# Altium PCB 温湿度.PcbDoc
Units mil, origin at the board's own origin, x right, y up, seen from the top; angles counter-clockwise.
Board outline 3735 x 1965 mil, 2 copper layers (Top Layer, Bottom Layer); 60 components, 69 nets, 275 pads, 113 vias.
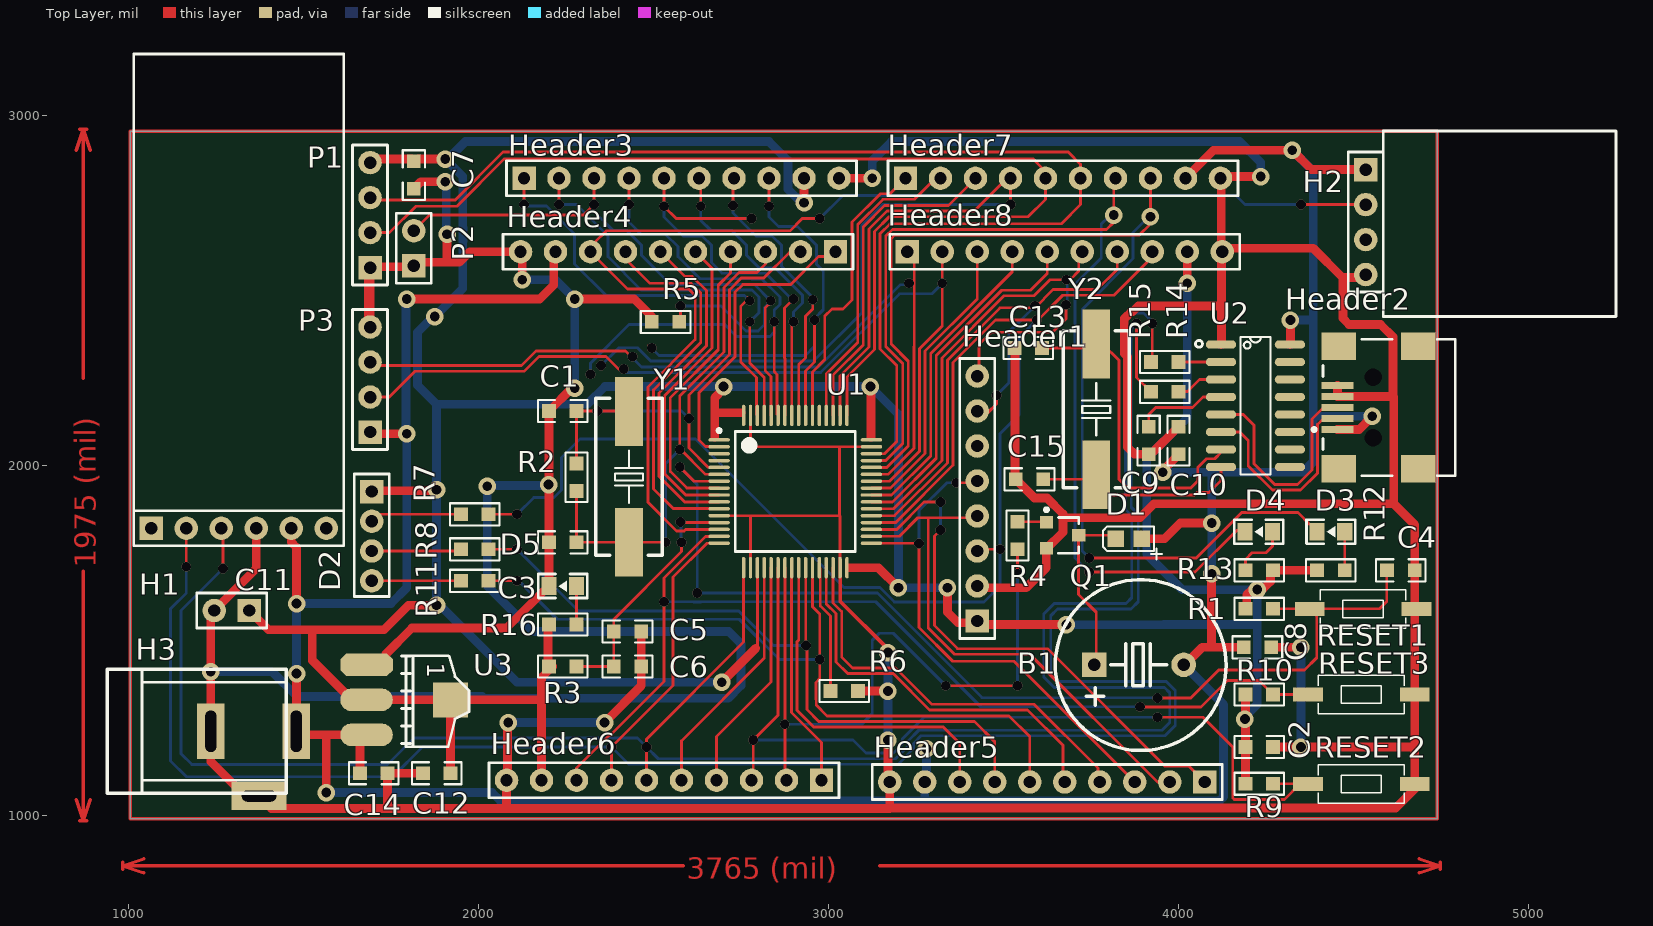
[diagram p0: Top Layer view]
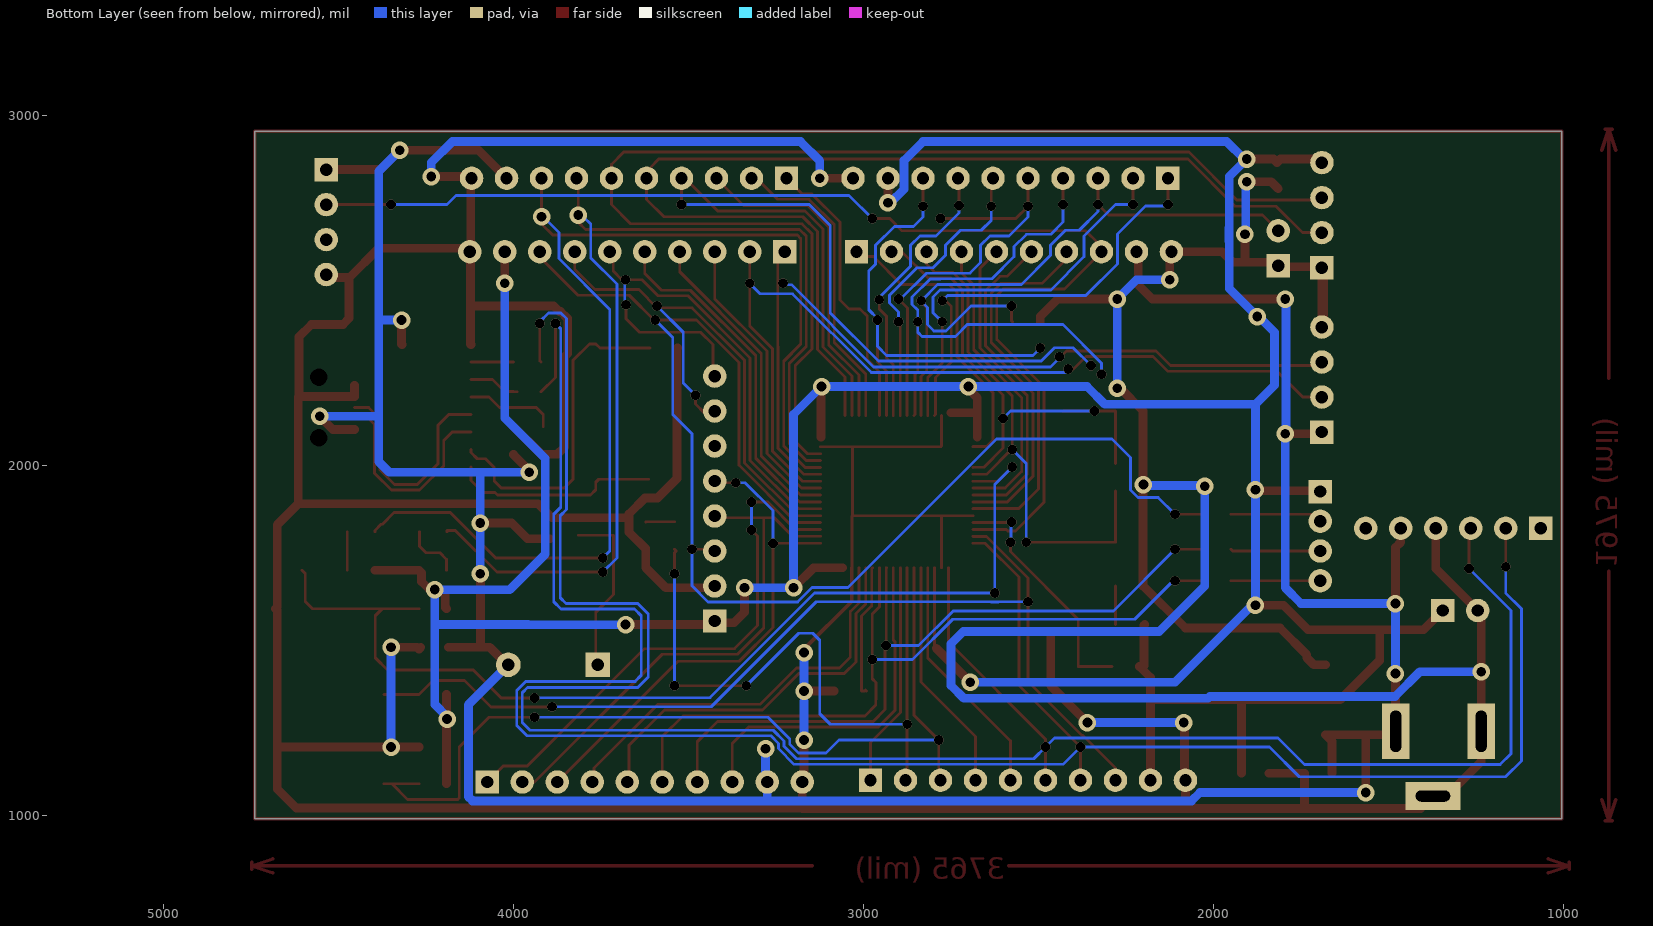
[diagram p1: Bottom Layer view, seen from below]

## Layer stack, top to bottom
Top Solder: solder mask 0.4, Solder Resist, Dk 3.5
Top Layer: signal copper 1.4
Dielectric 1: dielectric 12.6, FR-4, Dk 4.8
Bottom Layer: signal copper 1.4
Bottom Solder: solder mask 0.4, Solder Resist, Dk 3.5

## Board outline
1005,990 4740,990 4740,2955 1005,2955

## Design rules (kind name [scope] priority, off if disabled: settings)
Clearance [All] p1: gap=8 ignorepadtopadclearanceinfootprint=FALSE
PolygonConnect [All] p1: connectstyle=Relief reliefconductorwidth=10 reliefentries=4 polygonreliefangle="90 Angle" airgapwidth=10
RoutingVias [All] p1: holewidth=12 width=25 viastyle="Through Hole" minholewidth=8 minwidth=20 maxholewidth=16 maxwidth=28
SolderMaskExpansion [All] p1: expansion=4
Width Width_1 [InNetClass('Power')] p1: maxlimit=30 minlimit=8 preferedwidth=25
Width [All] p2: maxlimit=10 minlimit=8 preferedwidth=8
30 further rules are at their usual default settings.

## Classes and differential pairs
net class Power: GND VCC3.3 VCC5

## Components (designator, comment, footprint, x,y, rotation, side; value= is the part's Value field where it differs from the comment)
B1 "BEEP6.5mm" "BEEP 6.5x12x6" 3887.05,1430 r270 top
C1 "10pf" 0805C 2240.63,2155 r0 top value=10pF
C2 "0.1uf" 0805C 4230.63,1195 r0 top
C3 "10pf" 0805C 2240.63,1780 r0 top value=10pF
C4 "10uF" 0805C 4635.63,1700 r0 top
C5 "10uF" 0805C 2425.63,1525 r180 top
C6 "104" 0805C 2425.63,1425 r180 top
C7 "0.1uF" 0805C 1815,2829.37 r270 top
C8 "104" 0805C 4225.63,1480 r180 top
C9 "0.1uf" 0805C 3915,2070.63 r270 top
C10 "0.1uf" 0805C 4000,2070.63 r270 top
C11 "220uf" HDR2.54-LI-2P 1295,1585 r180 top
C12 "104" 0805C 1880.63,1120 r0 top
C13 "22pf" 0805C 3570.63,2335 r180 top value=0.1uf
C14 "104" 0805C 1700.63,1120 r180 top
C15 "22pf" 0805C 3574.37,1960 r180 top value=0.1uf
D1 "Diode 1N4148" 0805D 3857.6,1790 r180 top
D2 "LEDFULL" LEDFULL 1695,1775 r270 top
D3 "LED0" LED_0805_B 4435.63,1810 r0 top
D4 "LED0" LED_0805_B 4229.37,1810 r0 top
D5 "LED0" LED_0805_B 2240.63,1655 r0 top
H1 "BLUETOOTH模块" BLUETOOTH 1305,1860 r0 top
H2 "DHT11温湿度传感器" DHT11 4535,2695 r270 top
H3 "POWER" DC-005 1235,1240 r180 top
Header1 "Header x8" HDR2.54-M-LI-8P 3425,1905 r90 top
Header2 "USB_MICRO" USB/SM0.8-6H5 4763.58,2165.2 r0 top
Header3 "switch" HDR2.54-LI-10P 2580,2820 r0 top
Header4 "switch" HDR2.54-LI-10P 2570,2610 r180 top
Header5 "switch" HDR2.54-LI-10P 3625,1095 r180 top
Header6 "switch" HDR2.54-LI-10P 2530,1100 r180 top
Header7 "switch" HDR2.54-LI-10P 3670,2820 r0 top
Header8 "switch" HDR2.54-LI-10P 3675,2610 r0 top
P1 "ACIN" HDR2.54-LI-4P 1690,2715 r90 top
P2 "P2" HDR2.54-LI-2P 1815,2620 r90 top
P3 "ACIN" HDR2.54-LI-4P 1690,2245 r90 top
Q1 "S8050" SOT-23R 3663.74,1800 r270 top
R1 "10K" 0805R 4230.63,1590 r0 top value=330
R2 "Res2" 0805R 2280,1965.63 r90 top value=1M
R3 "10R" 0805R 2240.63,1425 r180 top
R4 "1K" 0805R 3540,1799.37 r90 top
R5 "10K" 0805R 2534.37,2410 r0 top
R6 "10K" 0805R 3045,1355 r180 top
R7 "1K" 0805R 1989.37,1860 r0 top value=330
R8 "1K" 0805R 1989.37,1760 r0 top value=330
R9 "10K" 0805R 4230.63,1090 r0 top value=330
R10 "10K" 0805R 4230.63,1345 r0 top value=330
R11 "1K" 0805R 1989.37,1670 r0 top value=330
R12 "1K" 0805R 4435.63,1700 r0 top value=330
R13 "1K" 0805R 4230.63,1700 r180 top value=330
R14 "330Ω" 0805R 3960.63,2295 r0 top value=330
R15 "330Ω" 0805R 3960.63,2210 r0 top value=330
R16 "1K" 0805R 2240.63,1545 r0 top value=330
RESET1 "RESET" QKEY 4730,1730 r180 top
RESET2 "RESET" QKEY 4725,1230 r180 top
RESET3 "RESET" QKEY 4725,1485 r180 top
U1 "STM32F103RC" LQFP64-高密度 2905,1925 r0 top
U2 "CH340G" SOP16 4220,2170 r270 top
U3 "AMS1117-3.3" AMS1117 1680.06,1430.03 r270 top
Y1 "8MHz" "OSC HC-49SMD" 2430,1967.01 r90 top
Y2 "12MHz" "OSC HC-49SMD" 3765,2160 r90 top

## Footprints (in the part's own frame and the unit in brackets; to place one, negate y for a bottom-side part, rotate by r counter-clockwise, add the part's x,y. Pads: shape width x height; smd on the part's side, far side on the other; paste and mask are expansions set on the pad)
0805C [mm]
  rect 1x1 smd: 1(-1,0) 2(1,0)
  silkscreen extent -1.8,-0.8 1.8,0.8
0805D [mm]
  rect 1.2x1.2 smd: 1(0.95,0) 2(-0.95,0)
  silkscreen extent -2.42,-0.9 1.85,1.49
0805R [mm]
  rect 1x1 smd: 1(-1,0) 2(1,0)
  silkscreen extent -1.8,-0.8 1.8,0.8
AMS1117 [mil]
  oct 65x150 smd: 1(0.03,-0.06)
  oval 65x150 smd: 2(100.03,-0.06) 3(200.03,-0.06)
  rect 100x100 smd: 4(100.03,239.94)
  silkscreen extent -26,100 234,293
"BEEP 6.5x12x6" [mm] "6.5*12*6mm(脚距,直径,高度)"
  rect 1.8x1.8 hole 0.9: 1(0,-3.25)
  round 1.8 hole 0.9: 2(0,3.25)
  silkscreen extent -6.17,-6.07 6.22,6.33, body extent -6,-6 6,6, height 6.05
BLUETOOTH [mm] "蓝牙模块"
  rect 1.7x1.7 hole 0.9: 1(-6.096,-1.016)
  round 1.7 hole 0.9: 2(-3.556,-1.016) 3(-1.016,-1.016) 4(1.524,-1.016) 5(4.064,-1.016) 6(6.604,-1.016)
  silkscreen extent -7.37,-2.29 7.87,33.4, body extent -7.37,-2.29 7.87,0.25, height 8.5
DC-005 [mm] "5.5*2.1mm，DC30V,2.5A"
  rect 2x4 hole 0.8 slot 3 at 90 deg: 1(-6.2,0) 2(0,0)
  rect 4x2 hole 0.8 slot 2.5 at 0 deg: 3(-3.5,4.7)
  silkscreen extent -5.48,-4.5 7.5,4.5, body extent -6.55,-4.5 7.5,4.8, height 11.2
DHT11 [mm] "温湿度传感器"
  rect 1.7x1.7 hole 0.9: 1(-3.81,0)
  round 1.7 hole 0.9: 2(-1.27,0) 3(1.27,0) 4(3.81,0)
  silkscreen extent -6.6,-1.27 6.86,18.16, body extent -5.08,-1.27 5.08,1.27, height 8.5
HDR2.54-LI-2P [mm] "排针，2脚"
  rect 1.7x1.7 hole 0.9: 1(-1.27,0)
  round 1.7 hole 0.9: 2(1.27,0)
  silkscreen extent -2.54,-1.27 2.54,1.27, body extent -2.54,-1.27 2.54,1.27, height 8.5
HDR2.54-LI-4P [mm] "排针，4脚"
  rect 1.7x1.7 hole 0.9: 1(-3.81,0)
  round 1.7 hole 0.9: 2(-1.27,0) 3(1.27,0) 4(3.81,0)
  silkscreen extent -5.08,-1.27 5.08,1.27, body extent -5.08,-1.27 5.08,1.27, height 8.5
HDR2.54-LI-10P [mm] "排针，10脚"
  rect 1.7x1.7 hole 0.9: 1(-11.43,0)
  round 1.7 hole 0.9: 2(-8.89,0) 3(-6.35,0) 4(-3.81,0) 5(-1.27,0) 6(1.27,0) 7(3.81,0) 8(6.35,0) 9(8.89,0) 10(11.43,0)
  silkscreen extent -12.7,-1.27 12.7,1.27, body extent -12.7,-1.27 12.7,1.27, height 8.5
HDR2.54-M-LI-8P [mm] "排母，8脚"
  rect 1.7x1.7 hole 0.9: 1(-8.89,0)
  round 1.7 hole 0.9: 2(-6.35,0) 3(-3.81,0) 4(-1.27,0) 5(1.27,0) 6(3.81,0) 7(6.35,0) 8(8.89,0)
  silkscreen extent -10.16,-1.27 10.16,1.27, body extent -10.16,-1.27 10.16,1.27, height 8.5
LED_0805_B [mm]
  rect 1.1x1.3 smd: 1(1,0) 2(-1,0)
  silkscreen extent -1.78,-0.87 1.78,0.87, body extent -1.01,-0.63 1.01,0.63, height 1.1
LEDFULL [mm] "全彩LED"
  rect 1.7x1.7 hole 0.9: 1(-3.81,0)
  round 1.7 hole 0.9: 2(-1.651,0) 3(0.508,0) 4(2.667,0)
  silkscreen extent -5.08,-1.27 3.81,1.27
LQFP64-高密度 [mm]
  oval 1.55x0.25 smd: 1(-5.525,3.75) 2(-5.525,3.25) 3(-5.525,2.75) 4(-5.525,2.25) 5(-5.525,1.75) 6(-5.525,1.25) 7(-5.525,0.75) 8(-5.525,0.25) 9(-5.525,-0.25) 10(-5.525,-0.75) 11(-5.525,-1.25) 12(-5.525,-1.75) 13(-5.525,-2.25) 14(-5.525,-2.75) 15(-5.525,-3.25) 16(-5.525,-3.75) 33(5.525,-3.75) 34(5.525,-3.25) 35(5.525,-2.75) 36(5.525,-2.25) 37(5.525,-1.75) 38(5.525,-1.25) 39(5.525,-0.75) 40(5.525,-0.25) 41(5.525,0.25) 42(5.525,0.75) 43(5.525,1.25) 44(5.525,1.75) 45(5.525,2.25) 46(5.525,2.75) 47(5.525,3.25) 48(5.525,3.75)
  oval 0.25x1.55 smd: 17(-3.75,-5.525) 18(-3.25,-5.525) 19(-2.75,-5.525) 20(-2.25,-5.525) 21(-1.75,-5.525) 22(-1.25,-5.525) 23(-0.75,-5.525) 24(-0.25,-5.525) 25(0.25,-5.525) 26(0.75,-5.525) 27(1.25,-5.525) 28(1.75,-5.525) 29(2.25,-5.525) 30(2.75,-5.525) 31(3.25,-5.525) 32(3.75,-5.525) 49(3.75,5.525) 50(3.25,5.525) 51(2.75,5.525) 52(2.25,5.525) 53(1.75,5.525) 54(1.25,5.525) 55(0.75,5.525) 56(0.25,5.525) 57(-0.25,5.525) 58(-0.75,5.525) 59(-1.25,5.525) 60(-1.75,5.525) 61(-2.25,5.525) 62(-2.75,5.525) 63(-3.25,5.525) 64(-3.75,5.525)
  silkscreen extent -5.65,-4.35 4.35,4.55, body extent -5,-5 5,5, height 1.6
"OSC HC-49SMD" [mm]
  rect 5x2 smd: 1(-4.75,0) 2(4.75,0)
  silkscreen extent -5.7,-2.4 5.7,2.4, body extent -6.5,-2.32 6.5,2.33, height 4.63
QKEY [mil]
  rect 85x40 smd: 1(50,140) 2(355,140)
  silkscreen extent 80,85 325,195
SOP16 [mm]
  oval 0.6x2.2 smd: 1(-4.445,-2.5) 2(-3.175,-2.5) 3(-1.905,-2.5) 4(-0.635,-2.5) 5(0.635,-2.5) 6(1.905,-2.5) 7(3.175,-2.5) 8(4.445,-2.5) 9(4.445,2.5) 10(3.175,2.5) 11(1.905,2.5) 12(0.635,2.5) 13(-0.635,2.5) 14(-1.905,2.5) 15(-3.175,2.5) 16(-4.445,2.5)
  silkscreen extent -5,-4.35 5,1.1
SOT-23R [mm]
  rect 0.9x0.95 smd: 1(0.95,-1.048) 2(-0.95,-1.048) 3(0,1.302)
  silkscreen extent -1.98,-1.17 1.3,1.3
USB/SM0.8-6H5 [mm]
  rect 2.3x0.5 smd: 1(-7.85,-1.6) 2(-7.85,-0.8) 3(-7.85,0) 4(-7.85,0.8) 5(-7.85,1.6)
  rect 2.5x2 smd: 6(-7.75,4.45) 7(-1.996,4.45) 8(-7.75,-4.45) 9(-1.996,-4.45)
  round 0.6 hole 1.27 unplated: MH1(-5.25,2.2) MH2(-5.25,-2.2)
  silkscreen extent -9.67,-4.95 0.7,4.95

## Part data
B1: library part BEEP
C1 C3 C9 C10 C12 C13 C14 C15: library part Cap, "Capacitor", LatestRevisionDate=17-Jul-2002, LatestRevisionNote="Re-released for DXP Platform.", PackageReference=RAD-0.3, Published=8-Jun-2000, Publisher="Altium Limited"
  C9 C10 C12 C13 C14 C15: PackageDescription="Radial Cap, Thru-Hole; 2 Leads; 0.3 in Pin Spacing"
C2 C6 C8: library part C
C4 C7: library part CAP, "Capacitor"
C5: library part C_2
C11: library part "Cap Pol3", "Polarized Capacitor (Surface Mount)", LatestRevisionDate=29-May-2009, LatestRevisionNote="IPC-7351 Footprint Added.", PackageDescription="Chip Capacitor", PackageReference=C0805, Published=8-Jun-2000, Publisher="Altium Limited"
D1: "High Conductance Fast Diode", Code_JEDEC=DO-204-AH, ComponentLink1Description="Manufacturer Link", ComponentLink1URL=http://www.fairchildsemi.com/, ComponentLink2Description=Datasheet, ComponentLink2URL=http://www.fairchildsemi.com/ds/1N%2F1N4148.pdf, DatasheetVersion=1997, LatestRevisionDate=17-Jul-2002, LatestRevisionNote="Re-released for DXP Platform.", PackageDescription="Diode, Axial; Body 3.8 x 1.9 mm (LxDia. max), Lead Dia. 0.53 mm (max)", PackageReference=DO-35, Published=8-Jun-2000, Publisher="Altium Limited"
D2: "全彩LED"
D3 D4 D5: "Typical INFRARED GaAs LED", LatestRevisionDate=08-Jul-2005, LatestRevisionNote="Mech Layer 1 removed.", PackageDescription="LED; 2 Leads", PackageReference=LED-0, Published=8-Jun-2000, Publisher="Altium Limited"
H1: library part BLUETOOTH
H2: library part DHT11
H3: library part DC_IN
Header1: "红外2个 4VCC 4GND 2信号线"
Header3 Header4 Header5 Header6 Header7 Header8: library part "Header X10"
P1 P3: library part P4, "Header, 4-Pin"
P2: "Header, 2-Pin"
Q1: library part NPN, "8050/BCW846/BCW847"
R1 R7 R8 R9 R10 R11 R12 R13 R14 R15 R16: library part Res2, "Resistor", Manufacturer="Generic Components", Class=Passive, Published=08/06/2000, Publisher="Altium Hobart Technology Centre", SubClass=Resistor
R2: "Resistor", LatestRevisionDate=17-Jul-2002, LatestRevisionNote="Re-released for DXP Platform.", PackageReference=AXIAL-0.4, Published=8-Jun-2000, Publisher="Altium Limited"
R3 R4: library part R_1
R5 R6: library part R
RESET1 RESET2 RESET3: library part SW-PB
Y1 Y2: library part XTAL, "Crystal Oscillator", LatestRevisionDate=17-Jul-2002, LatestRevisionNote="Re-released for DXP Platform.", Published=8-Jun-2000, Publisher="Altium Limited"

## Via types
v1: diameter 28, hole 28, Top Layer to Bottom Layer, 68 vias
v2: diameter 50, hole 28, Top Layer to Bottom Layer, 45 vias

## Nets (pads, with @x,y where several pads share a name; then routed paths per layer and width w, separated by ;. In a path a pad name is that pad's centre, name@x,y a point inside that pad or via, vN(x,y) a via of type N, cw(c..) or ccw(c..) an arc to the next point about the centre after c; other vN are vias at no path point)
BOOT0: Header3.3 P2.2 R5.2 U1.60 | length 2012.5
  Top Layer w8: P2.2 1860,2715 2300,2715 v1(2330,2745) 2330,2810 2325,2815 Header3.3 ; R5.2 2576.86,2413.12 v1(2576.86,2455) ; v1(2835,2470) 2835,2465.23 2819,2449.23 2819,2271.25 2836.1,2254.15 U1.60
  Bottom Layer w8: v1(2330,2745) 2330,2725 2383.54,2671.46 2422.83,2671.46 2465.46,2628.83 2465.46,2600.24 2548.7,2517 2773.25,2517 2773.72,2516.54 2788.46,2516.54 v1(2835,2470) 2835,2469.23 2817,2451.23 2817,2402 2799,2384 2764.23,2384 2693.23,2455 v1(2576.86,2455)
GND: C1.1 C2.2 C3.1 C4.2 C5.1 C6.1 C7.2 C8.1 C9.2 C10.1 C11.2 C12.1 C13.2 C14.1 C15.2 D5.2 H1.4 H2.4 H3.2 H3.3 Header1.2 Header2.4 Header2.5 Header3.10 Header4.10 Header5.10 Header6.10 Header7.10 Header8.10 P1.1 P2.1 P3.4 Q1.1 R5.1 R6.1 RESET1.1 RESET2.1 RESET3.1 U1.12 U1.18 U1.31 U1.47 U1.63 U2.1 U3.1 | length 21203.3
  Top Layer w8: U1.12 2777.05,1856.1 ; U1.18 2777.05,1856.1 ; U1.63 2777.05,2055 2779.09,2052.95 3030,2052.95 ; U1.31 3032.95,1855 3031.85,1856.1 ; U1.47 3030,2052.95 ; 2777.05,1856.1 3031.85,1856.1 ; 3030,2052.95 3031.85,2051.1 3031.85,1856.1
  Top Layer w10: U1.31 3032.95,1612.05 3170,1475 v2(3170,1465)
  Top Layer w25: H1.4 1365,1705 C11.2 1235,1575 v2(1235,1410) H3.2 1235,1153.39 1333.43,1054.96 H3.3 1408.26,1019.5 3174,1019.5 3175,1020.5 ; U3.1 1713.57,1430 1733.57,1450 1733.57,1458.57 1810,1535 2080,1535 D5.2@2201.26,1656.26 ; P3.4@1685,2395 P1.1@1685,2565 ; P3.4 P1.1 1692.5,2567.5 1812.5,2567.5 P2.1 1825,2580 1910,2580 ; 1740,1025 C14.1 C12.1 ; C7.2 1835,2810 v2(1905,2810) ; v2(1910,2660) 1910,2580 ; 2080,1025 Header6.10 2082.5,1102.5 2082.5,1262.5 v2(2085,1265) ; v2(2125,2530) 2125,2605 Header4.10 1975,2610 1945,2580 1910,2580 ; D5.2 D5.2@2201.26,1656.26 ; v2(2275,2220) 2266.26,2220 C1.1 C3.1 D5.2@2201.26,1656.26 ; v2(2275,2475) 2445,2475 2495,2425 R5.1 ; 2425.5,1330 2360.5,1265 v2(2360,1265) 2465,1370 C6.1 C5.1 ; Header3.10 v2(3125,2820) ; R6.1 v2(3170,1355) ; v2(3170,1215) 3170,1125 3185,1110 3170,1095 3175,1090 3175,1020.5 ; Header1.2@3425,1650 3565,1650 3622.48,1707.48 Q1.1 3623.46,1762.6 3670,1809.13 3670,1845 ; C13.2 3533.13,2333.13 3533.13,1961.87 C15.2 3588.11,1906.89 3624.08,1906.89 3670,1860.97 3670,1845 ; C10.1 3921.26,2031.26 C9.2 3874.64,2031.26 3854.5,2051.4 3854.5,2310.15 3845,2319.65 3845,2420 3846.21,2420 3865.71,2439.5 3869.5,2439.5 3885,2455 4123.29,2455 ; U2.1 4122.6,2345 4123.29,2345.69 4123.29,2455 ; v2(4235,2825) 4125,2825 Header7.10 4122.5,2817.5 4122.5,2612.5 Header8.10 ; C8.1 4270,1475 4275,1480 v2(4350,1480) ; C2.2 v2(4350,1195) 4675,1195 ; Header2.5 Header2.4 4613.31,2196.69 ; H2.4 4526.98,2536.98 4471.98,2536.98 4470,2535 ; 3175,1020.5 4620.5,1020.5 4675,1075 RESET2.1 4675,1195 ; 3670,1845 3675.03,1850.03 3890.03,1850.03 3930,1890 4615,1890 ; 4123.29,2455 4123.29,2608.29 Header8.10 ; Header8.10 4135,2620 4385,2620 4470,2535 ; 4470,2535 4470,2420 4487.5,2402.5 4577.5,2402.5 4613.31,2366.69 4613.31,2196.69 ; 4613.31,2196.69 4615,2195 4615,1890 ; 4615,1890 4675,1830 C4.2 4675,1595 RESET1.1 4675,1585 RESET3.1 4675,1195
  Bottom Layer w25: v2(1235,1410) 1410.65,1410 1481.41,1339.24 2010.82,1339.24 2015.56,1334.5 2713.85,1334.5 2750,1370.65 2750,1490 2715,1525 2155,1525 2025,1655 v2(2025,1940) 2027.5,1942.5 2197.5,1942.5 v2(2200,1945) ; v2(1905,2810) 1907.5,2807.5 1907.5,2662.5 v2(1910,2660) ; v2(2085,1265) v2(2360,1265) ; v2(2125,2530) 2220,2530 v2(2275,2475) v2(2275,2220) ; v2(3125,2820) 3125,2870 3180,2925 4175,2925 4235,2865 v2(4235,2825) ; v2(3170,1215) 3170,1325 ; v2(3170,1355) v2(3170,1465) ; v2(4350,1195) v2(4350,1480)
NetB1_1: B1.1 D1.1 Q1.3 | length 494.2
  Top Layer w8: B1.1 3765,1435.91 3765,1580 3714,1631 3714,1799 Q1.3 D1.1@3815.24,1800
NetC5_2: C5.2 C6.2 R3.1 U1.13 | length 702.5
  Top Layer w8: R3.1@2290,1425 C6.2 C5.2 2386.26,1559.6 2574.45,1747.8 2580,1753.34 v1(2580,1780) ; v1(2576.79,1838.21) 2578.58,1836.42 U1.13
  Bottom Layer w8: v1(2576.79,1838.21) 2578.4,1836.6 2578.4,1781.6 v1(2580,1780)
NetC9_1: C9.1 U2.4 | length 262.3
  Top Layer w8: C9.1 3915,2145 3935,2165 4040,2165 4070,2195 U2.4
NetC13_1: C13.1 U2.7 Y2.2 | length 959.5
  Top Layer w8: C13.1 3752.99,2335 Y2.2 3782.99,2347.01 3830,2300 3830,1960 3855,1935 4035,1935 4055,1955 4055,1993.6 4080.22,2018.81 4103.81,2018.81 4121.57,2036.57 U2.7
NetC15_1: C15.1 U2.8 Y2.1 | length 594.7
  Top Layer w8: C15.1 3756.5,1960 3765,1951.5 3765,1930 3780,1915 4045.75,1915 4052.75,1922 4087,1922 4121.57,1956.57 U2.8
NetD2_2: D2.2 R7.1 | length 263.3
  Top Layer w8: D2.2 1715,1860 R7.1
NetD2_3: D2.3 R8.1 | length 257.1
  Top Layer w8: D2.3 1945,1755 R8.1
NetD2_4: D2.4 R11.1 | length 255
  Top Layer w8: D2.4 R11.1
NetD3_1: D3.1 R12.2 | length 110
  Top Layer w8: R12.2 D3.1
NetD4_1: D4.1 R13.2 | length 165.5
  Top Layer w8: R13.2 4191.26,1731.26 4210,1750 4250,1750 4268.74,1768.74 D4.1
NetD5_1: D5.1 R16.2 | length 110
  Top Layer w8: R16.2 D5.1
NetQ1_2: Q1.2 R4.2 | length 83
  Top Layer w8: R4.2 3621.14,1838.74 Q1.2
NetR6_2: R6.2 U1.28 | length 378.7
  Top Layer w8: U1.28 2976.66,1704.72 2976.66,1598.34 3005.63,1569.37 R6.2 R6.2@2996.26,1355 ; R6.2@2991.26,1355 R6.2@2993.9,1357.64
NetR14_2: R14.2 U2.2 | length 121.6
  Top Layer w8: R14.2 U2.2
NetR15_2: R15.2 U2.3 | length 146.1
  Top Layer w8: R15.2@3990,2210 R15.2 4000.81,2210.81 4025.81,2210.81 4060,2245 U2.3
OSC_IN: C1.2 Header4.2 R2.2 U1.5 Y1.2 | length 1427.8
  Top Layer w8: R2.2 C1.2 v1(2340,2155) 2429.01,2155 Y1.2 ; U1.5 2687.13,1994.25 2655.75,1994.25 2601,2049 2601,2200.95 2717,2316.95 2717,2501.4 2750.6,2535 2815,2535 2890,2610 Header4.2
  Bottom Layer w8: v1(2340,2155) 2580,2155 v1(2601,2134)
OSC_OUT: C3.2 Header4.3 R2.1 U1.6 Y1.1 | length 1520
  Top Layer w8: R2.1 C3.2 Y1.1 v1(2535,1780) ; U1.6 2648.46,1974.21 2575,2047.67 2575,2197.58 2701,2323.58 2701,2508.02 2743.98,2551 2796,2551 2820,2575 Header4.3
  Bottom Layer w8: v1(2535,1780) 2535,2005 v1(2575,2045)
PA0: H2.2 Header4.8 U1.14 | length 3538.5
  Top Layer w8: U1.14 2592.08,1816.73 2587.56,1812.21 2566.02,1812.21 2484,1894.23 2484,2224 2619,2359 2619,2485.75 2600.75,2504 2426,2504 Header4.8 2329.76,2619.76 2329.76,2634.76 2365,2670 2890,2670 2925,2705 v1(2975,2705) ; v1(4350,2745) H2.2
  Bottom Layer w8: v1(2975,2705) 3041,2771 4164,2771 4190,2745 v1(4350,2745)
PA1: Header6.8 R10.2 RESET3.2 U1.15 | length 2903.1
  Top Layer w8: Header6.8 2280,1135 2373,1228 2375.33,1228 2530,1382.67 v1(2530,1610) 2530,1677.77 2648.92,1796.69 2687.13,1796.69 U1.15 ; v1(3890,1310) 3891,1309 4064,1309 4140,1385 4230,1385 R10.2 RESET3.2
  Bottom Layer w8: v1(2530,1610) 2613.23,1610 2614.23,1609 2635.77,1609 2636.77,1610 3135,1610 3435,1310 v1(3890,1310)
PA4/SDA: Header6.5 U1.20 | length 705.4
  Top Layer w8: Header6.5 2580,1212.67 2816.42,1449.09 U1.20
PA5/SCL: Header6.4 U1.21 | length 672.1
  Top Layer w8: Header6.4 2680,1225 2836.1,1381.1 U1.21
PA6: Header6.3 R9.2 RESET2.2 U1.22 | length 2568.8
  Top Layer w8: Header6.3 2785,1105 v1(2785,1215) 2855.79,1285.79 U1.22 ; v1(3940,1280) 4070,1280 4155,1195 4155,1049.69 4159.69,1045 4302.5,1045 RESET2.2@4347.5,1090 ; R9.2 RESET2.2@4347.5,1090 ; RESET2.2 RESET2.2@4347.5,1090
  Bottom Layer w8: v1(2785,1215) 3070,1215 3107,1178 3185.33,1178 3211,1203.67 3211,1218.58 3272.42,1280 v1(3940,1280)
PA7: Header6.2 R4.1 U1.23 | length 1961.3
  Top Layer w8: U1.23 2875.82,1707.13 2875.82,1104.18 Header6.2 ; v1(3335,1370) v1(3540,1370) ; v1(3540,1690) 3540,1750 3535,1755 R4.1
  Bottom Layer w8: v1(2875,1260) 3095,1260 3125,1290 3125,1500 3145,1520 3185,1520 v1(3335,1370) ; v1(3540,1370) v1(3540,1690)
PA8: Header8.3 U1.41 | length 832.5
  Top Layer w8: U1.41 3177.31,1934.84 3276,2033.53 3276,2326.51 3425,2475.51 Header8.3
PA11: D3.2 Header7.8 U1.44 | length 3427.5
  Top Layer w8: U1.44 3166.61,1993.9 3228,2055.29 3228,2297.25 3179.54,2345.72 3179.54,2648.44 3189.1,2658 3888,2658 3920,2690 v2(3920,2710) Header7.8 ; v1(3745,1735) 4050.79,1735 4180.79,1865 4341.26,1865 4374.67,1831.59 4378.61,1831.59 4396.26,1813.94 D3.2
  Bottom Layer w8: v1(3745,1735) 3725,1755 3725,2445.7 3870.46,2591.17 3870.46,2665.46 v2@3917.5,2712.5
PA12: D4.2 Header7.7 U1.45 | length 3087.3
  Top Layer w8: U1.45 3163.67,2013.58 3212,2061.91 3212,2290.63 3163.54,2339.09 3163.54,2655.06 3182.47,2674 3794.35,2674 3815,2694.65 v2(3815,2715) 3815,2815 Header7.7 ; v1(3745,1695) 4047.67,1695 4166.61,1813.94 4190,1813.94 D4.2
  Bottom Layer w8: v1(3745,1695) 3704.75,1735.25 3704.75,2517.98 3779.54,2592.77 3779.54,2689.54 v2@3800,2710
PA15: Header7.4 U1.50 | length 2645.7
  Top Layer w8: v1@2349,2286 v1(2350,2285) ; U1.50 3032.95,2255.07 3115.54,2337.65 3115.54,2674.94 3166.96,2726.37 3416.37,2726.37 3500.24,2810.24 3510.24,2810.24 Header7.4 v1(3520,2745)
  Bottom Layer w8: v1(2350,2285) 2401,2336 2454,2336 2492,2298 2957.4,2298 3095,2435.6 3095,2685 3155,2745 v1(3520,2745)
PB0: Header5.7 R8.2 U1.26 | length 2118.2
  Top Layer w8: R8.2 v1(2110,1760) ; U1.26 2934.88,1707.13 2934.88,1486.33 v1(2936.1,1485.11) 2936.1,1475.33 2938.21,1473.21 2938.21,1301.79 2972,1268 3417,1268 3475,1210 Header5.7
  Bottom Layer w8: v1(2110,1760) 2286,1584 2743.63,1584 2842.52,1485.11 v1(2936.1,1485.11)
PB1: Header5.6 R11.2 U1.27 | length 2222.3
  Top Layer w8: R11.2 v1(2110,1670) ; U1.27 2954.21,1595.79 2975,1575 v1(2975,1445) 2975,1390.08 2964.57,1379.66 2964.57,1330.34 2965,1329.92 2965,1315 2996,1284 3516,1284 3575,1225 Header5.6
  Bottom Layer w8: v1(2110,1670) 2115,1670 2225,1560 2745,1560 2860,1445 v1(2975,1445)
PB3: Header3.8 U1.55 | length 1369
  Top Layer w8: v1@2487,2343 v1(2495,2335) ; v1(2830,2740) Header3.8 ; U1.55 2934.53,2269.78 2960,2295.25 v1(2960,2415)
  Bottom Layer w8: v1(2495,2335) 2516,2314 2934,2314 2960,2340 2960,2405.77 v1@2950.77,2415 ; v1(2830,2740) 2830,2710 2857.5,2682.5 2911.79,2682.5 2965.46,2628.83 2965.46,2574.54 2985,2555 2985,2444.4 2960,2419.4 v1(2960,2415)
PB4: Header3.7 U1.56 | length 816.4
  Top Layer w8: v1(2727.5,2742.5) 2727.5,2817.5 Header3.7 ; U1.56 2914.84,2287.79 2934,2306.94 2934,2425.77 2955,2446.77 v1(2955,2473.3)
  Bottom Layer w8: v1(2727.5,2742.5) 2727.5,2720.73 2792.77,2655.46 2838.83,2655.46 2865.46,2628.83 2865.46,2568.93 2955,2479.4 v1(2955,2473.3)
PB5: Header3.6 U1.57 | length 874.6
  Top Layer w8: Header3.6 2635,2815 v1(2635,2740) ; U1.57 2895.16,2399.75 2900,2404.59 v1(2900,2410)
  Bottom Layer w8: v1(2635,2740) 2635,2700 2663.54,2671.46 2722.83,2671.46 2765.46,2628.83 2765.46,2600.24 2801.17,2564.54 2847.23,2564.54 2926,2485.77 2926,2464.23 2900,2438.23 v1(2900,2410)
PB6: Header3.5 U1.58 | length 1214.6
  Top Layer w8: Header3.5 v1(2530,2740) 2565,2705 v1(2780,2705) ; U1.58 2875.47,2305.54 2874,2307.01 2874,2449 v1(2900,2475)
  Bottom Layer w8: v1(2530,2740) 2530,2710 2584.54,2655.46 2638.83,2655.46 2665.46,2628.83 2665.46,2579.54 2696,2549 2786.51,2549 2786.97,2548.54 2820.86,2548.54 2894.4,2475 v1(2900,2475)
PB7: Header3.4 U1.59 | length 1662.3
  Top Layer w8: v1(2430,2745) Header3.4 ; v1(2845,2410) 2845,2267.88 2853.02,2259.86 2853.02,2145.28 U1.59
  Bottom Layer w8: v1(2320,2260) 2320,2291.77 2430.23,2402 2703.5,2402 2737.5,2368 2833,2368 2845,2380 v1(2845,2410) 2845,2443.23 2861,2459.23 2861,2480.77 2809.23,2532.54 2780.35,2532.54 2779.88,2533 2632.7,2533 2569.54,2596.17 2569.54,2624.76 2534.3,2660 2465,2660 2430,2695 v1(2430,2745)
PB8: Header3.2 U1.61 | length 1156.4
  Top Layer w8: v1(2230,2745) Header3.2 ; v1(2775,2410) 2775,2292.63 2816.42,2251.21 U1.61
  Bottom Layer w8: v1(2230,2745) 2280,2745 2369.54,2655.46 2369.54,2596.17 2464.7,2501 2766.63,2501 2767.09,2500.54 2781.23,2500.54 2801,2480.77 2801,2436 v1(2775,2410)
PB9: Header3.1 U1.62 | length 1248.8
  Top Layer w8: v1(2130,2745) Header3.1 ; v1@2768.47,2479.76 2768.47,2473.47 2749,2454 2749,2296 2793.97,2251.03 2793.97,2145.28 U1.62
  Bottom Layer w8: v1(2130,2745) 2133.83,2741.17 2193.83,2741.17 2274.54,2660.46 2274.54,2575.46 2365,2485 2760,2485 v1(2775,2470)
PB10: Header5.5 U1.29 | length 1176.9
  Top Layer w8: U1.29 2993.58,1604.04 3021.63,1576 3021.63,1438.37 3055,1405 3185.05,1405 3289.05,1301 3569,1301 3670,1200 3670,1096.55 3650,1096.55 3651.55,1095 Header5.5
PB11: Header5.4 U1.30 | length 1213.1
  Top Layer w8: U1.30 3013.27,1606.99 3037.63,1582.62 3037.63,1452.37 3069,1421 3191.67,1421 3295.67,1317 3588,1317 3770,1135 3770,1096.55 3750,1096.55 3751.55,1095 Header5.4
PB12/CS: Header1.5 Header5.3 U1.33 | length 1469.5
  Top Layer w8: U1.33 3122.87,1777.01 3257.29,1777.01 3257.64,1777.36 v1(3258.82,1776.18) 3258.82,1536.18 3355,1440 3530,1440 Header5.3 ; v1(3365,1950) Header1.5@3425,1950
  Bottom Layer w8: v1(3258.82,1776.18) 3258.82,1870.59 3338.23,1950 v1(3365,1950)
PB13/SCL: Header1.4 Header5.2 U1.34 | length 1511.7
  Top Layer w8: U1.34 3202.05,1797.05 3255,1850 3285,1850 ; Header1.4@3425,1850 3285,1850 ; Header5.2 3940,1095 3575,1460 3360,1460 3285,1535 3285,1850
PB14/SDO: Header5.1 U1.35 | length 1547.1
  Top Layer w8: U1.35 3194.96,1816.73 3273.23,1895 v1(3320,1895) ; v1(3320,1815) 3303,1798 3303,1542 3369,1476 3625.26,1476 3960.79,1140.46 4029.54,1140.46 Header5.1
  Bottom Layer w8: v1(3320,1815) v1(3320,1895)
PB15/SDL: Header1.3 Header8.8 R7.2 U1.36 | length 4011.6
  Top Layer w8: R7.2 v1(2110,1860) ; U1.36 3192.02,1836.42 3356,2000.4 3356,2293.37 3477.63,2415 v1(3595,2415) 3598.23,2415 3669.23,2486 3816,2486 3915.24,2585.24 3915.24,2600.24 Header8.8 ; Header1.3@3430,1750 3440,1760 v1(3490,1760)
  Bottom Layer w8: v1(2110,1860) 2158,1908 2215.33,1908 2237,1929.67 2237,2022 2290,2075 2620,2075 3044,1651 3146.67,1651 3188.14,1609.54 3443.83,1609.54 3490,1655.7 v1(3490,1760) 3490,2090 3545,2145 3545,2365 v1(3595,2415) ; Header1.3 Header1.3@3450,1755
PC0: Header4.4 U1.8 | length 858.3
  Top Layer w8: U1.8 2595.16,1934.84 2548,1982 2548,2193.21 2685,2330.21 2685,2514.65 2720,2549.65 Header4.4
PC1: Header4.5 U1.9 | length 890.4
  Top Layer w8: Header4.5 2667,2563 2667,2334.84 2532,2199.84 2532,1975.37 2592.22,1915.16 U1.9
PC2: Header4.6 U1.10 | length 965
  Top Layer w8: Header4.6 2590,2540 2610,2540 2651,2499 2651,2341.46 2516,2206.46 2516,1968.75 2589.27,1895.47 U1.10
PC3: Header4.7 U1.11 | length 1102.3
  Top Layer w8: Header4.7 2420,2590 2490,2520 2607.37,2520 2635,2492.37 2635,2350.63 2500,2215.63 2500,1932.37 2556.23,1876.14 2687.13,1876.14 U1.11
PC4: Header6.1 U1.24 | length 643.5
  Top Layer w8: U1.24 2894.1,1706.42 2894.1,1293.28 2980,1207.37 Header6.1
PC5: Header5.8 U1.25 | length 1023.8
  Top Layer w8: U1.25 2914.84,1500.62 2910.1,1495.88 2910.1,1299.9 2958,1252 3328,1252 3375,1205 Header5.8
PC6/RS: Header1.7 Header8.7 U1.37 | length 1624.3
  Top Layer w8: U1.37 3189.08,1856.1 3340,2007.02 3340,2300 3490,2450 3590,2450 3642,2502 3767,2502 3825,2560 Header8.7 Header8.7@3810,2610 ; Header1.7@3430,2150 3455,2150 3480,2175 v1(3480,2200)
  Bottom Layer w8: Header1.7 Header1.7@3430.46,2160.46 ; v1(3480,2200) 3515,2235 3515,2380 v1(3590,2455)
PC7/BLK: Header1.8 Header8.6 U1.38 | length 1587.6
  Top Layer w8: U1.38 3186.14,1875.79 3324,2013.65 3324,2306.63 3501.73,2484.36 3586.73,2484.36 3632.37,2530 v1(3680,2530) 3690,2530 3715.24,2555.24 3715.24,2600.24 Header8.6 ; Header1.8@3430,2255 3430,2344.75 3465.25,2380 3640,2380 3678.75,2418.75 v1(3678.75,2458.75)
  Bottom Layer w8: v1(3678.75,2458.75) 3682.5,2462.5 3682.5,2527.5 v1(3680,2530)
PC8: Header8.5 U1.39 | length 1006.6
  Top Layer w8: U1.39 3183.19,1895.47 3308,2020.28 3308,2313.25 3495.11,2500.36 3577.73,2500.36 3625,2547.63 Header8.5
PC9: Header8.4 U1.40 | length 895.4
  Top Layer w8: U1.40 3180.25,1915.16 3292,2026.91 3292,2319.88 3525,2552.88 Header8.4
PC10: Header7.3 U1.51 | length 952.6
  Top Layer w8: U1.51 3013.27,2258.01 3099.54,2344.28 3099.54,2681.57 3160.34,2742.37 3342.37,2742.37 Header7.3
PC11: Header7.2 U1.52 | length 874
  Top Layer w8: U1.52 2993.58,2260.96 3083.54,2350.91 3083.54,2688.2 3155.34,2760 3245,2760 3305,2820 Header7.2
PC13: Header4.1 U1.2 | length 928.2
  Top Layer w8: U1.2 2687.13,2053.31 2648.92,2053.31 2630,2072.23 2630,2207.33 2733,2310.33 2733,2494.77 2755.23,2517 2892,2517 2971.77,2596.77 Header4.1@3020,2596.77 ; Header4.1 Header4.1@3020,2596.77 ; Header4.1@3020,2596.77 3026.62,2603.38 3040,2590 3020,2590 Header4.1@3020,2596.77
PD2: Header7.1 U1.54 | length 822.2
  Top Layer w8: U1.54 2954.21,2266.84 2989,2301.63 2989,2425.77 3010,2446.77 3041.77,2446.77 3067.54,2472.54 3067.54,2694.83 3148.71,2776 3176,2776 Header7.1
RESET: C4.1 R1.2 RESET1.2 U1.7 | length 3027.6
  Top Layer w8: v1(2575,1995) 2615.47,1954.53 U1.7 ; v1(3940,1335) 4035,1335 4115,1415 4360,1415 4395,1450 4395,1570 RESET1.2 ; R1.2 RESET1.2 ; C4.1@4605,1700 4595,1690 4595,1610 4575,1590 RESET1.2
  Bottom Layer w8: v1(2575,1995) 2625,1945 v1(2625,1635) 3140.05,1635 3439.05,1336 3939,1336 v1(3940,1335)
RXD: Header8.1 P3.3 U1.43 | length 2399.6
  Top Layer w8: P3.3@1690,2285 2122.37,2285 2164.37,2327 2420.23,2327 2437.23,2310 v1(2440,2310) ; U1.43 3169.55,1974.21 3244,2048.66 3244,2339.76 3245,2340.76 3245,2590 Header8.1
  Bottom Layer w8: v1(2440,2310) 2440,2307 2466,2281 2971,2281 3206.17,2516.17 3226.17,2516.17 v1(3230,2520)
RXD2: H1.3 Header6.6 R14.1 U1.17 | length 6290.6
  Top Layer w8: v1(1270,1705) H1.3@1270,1820 ; Header6.6 v1(2480,1195) 2480,1217.33 2757.36,1494.69 U1.17 ; R14.1 3925,2298.74 v1(3925,2405)
  Bottom Layer w8: v1(1270,1705) 1150,1585 1150,1175.69 1180.69,1145 1739.67,1145 1815.67,1221 2454,1221 v1(2480,1195) 2513.54,1161.46 3191.46,1161.46 3227,1197 3227,1211.95 3258.05,1243 3953,1243 3975,1265 3975,1350 3960,1365 3645,1365 3615,1395 3615,1575 3645,1605 3850,1605 3866.53,1621.53 3866.53,1855.85 3849,1873.37 3849,2419 3865,2435 3900,2435 3925,2410 v1(3925,2405)
SWDCLK: Header7.5 P1.2 U1.49 | length 3196.4
  Top Layer w8: P1.2 1745.7,2665 1820.7,2740 1937.63,2740 2072.63,2875 3585,2875 3610.24,2849.76 3610.24,2829.76 Header7.5 3620,2760 3570.37,2710.37 3173.59,2710.37 3131.54,2668.32 3131.54,2331.03 3052.64,2252.13 U1.49
SWDIO: Header7.6 P1.3 U1.46 | length 3526.3
  Top Layer w8: P1.3 1696.69,2758.31 1933.31,2758.31 2070,2895 3685,2895 3720,2860 Header7.6 3720,2745 3665,2690 3175.85,2690 3147.54,2661.69 3147.54,2332.46 3195,2285 3195,2067.54 3160.73,2033.27 U1.46
TXD: Header8.2 P3.2 U1.42 | length 2577.4
  Top Layer w8: P3.2 1745,2195 1819,2269 2130.79,2269 2172.79,2311 2364,2311 2400,2275 v1(2415,2275) ; U1.42 3174.37,1954.53 3260,2040.16 3260,2333.14 3325,2398.14 v1(3325,2520) Header8.2
  Bottom Layer w8: v1(2415,2275) 2425,2265 2977.63,2265 3202.63,2490 3295,2490 v1(3325,2520)
TXD2: H1.2 Header6.7 R15.1 U1.16 | length 6441.6
  Top Layer w8: v1(1165,1710) H1.2 ; Header6.7 v1(2380,1195) 2556,1371 2556,1681 2652.36,1777.36 U1.16 ; v1(3880,2405) 3880,2251.26 R15.1
  Bottom Layer w8: v1(1165,1710) 1165,1635 1120,1590 1120,1155 1165,1110 1755,1110 1840,1195 v1(2380,1195) 2429.54,1145.46 3198.09,1145.46 3243,1190.37 3243,1205.33 3264.67,1227 3962,1227 3991,1256 3991,1356.63 3965.06,1382.57 3652.43,1382.57 3635,1400 3635,1570 3654,1589 3864,1589 3885,1610 3885,1860 3865,1880 3865,2390 v1(3880,2405)
UD+: Header2.3 U2.5 | length 657.1
  Top Layer w8: U2.5 4185,2145 4215.53,2114.47 4215.53,2004.47 4275,1945 4340,1945 4381.25,1986.25 4381.25,2132.51 4413.93,2165.19 Header2.3
UD-: Header2.2 U2.6 | length 610.9
  Top Layer w8: U2.6 4175,2095 4199.53,2070.47 4199.53,1997.84 4268.37,1929 4349,1929 4397.25,1977.25 4397.25,2117.02 4413.93,2133.7 Header2.2
VCC3.3: C2.1 C7.1 C11.1 C12.2 D2.1 Header1.1 Header3.9 Header6.9 Header8.9 P1.4 R1.1 R3.2 R9.1 R10.1 R12.1 R13.1 R16.1 U1.1 U1.19 U1.32 U1.48 U1.64 U3.2 U3.4 | length 12067.5
  Top Layer w8: 2791.92,1476.92 2796.73,1481.73 U1.19
  Top Layer w25: C11.1 1400,1530 1525,1530 ; P1.4 1700,2875 1808.74,2875 C7.1 1818.74,2865 1828.74,2875 v2(1905,2875) ; D2.1 1697.5,1927.5 1877.5,1927.5 v2(1880,1930) ; v2(1880,1600) 1800,1600 1730,1530 1525,1530 ; C12.2 U3.4 ; Header6.9 2180,1330 ; R16.1@2196.26,1545 2198.76,1542.5 2198.76,1427.5 R3.2 ; R3.2@2211.26,1425 2180,1393.74 2180,1330 ; 2675,2080.22 2675,2150 ; v2(2695,1380) 2791.92,1476.92 ; v2(2700,2225) 2700,2218.24 2675,2193.24 2675,2150 ; 2749.78,2150 2675,2150 ; v2(2930,2750) Header3.9 ; 3060.22,1707.48 3142.52,1707.48 v2(3200,1650) ; v2(3120,2225) 3121.26,2223.74 3121.26,2080.22 ; v2(3340,1650) 3340,1580 3370,1550 3425,1550 3430,1545 v2(3680,1545) ; v2(4025,2520) Header8.9 ; R9.1 C2.1 R10.1 ; R1.1 4195,1593.74 4195,1630 4210,1645 v2(4225,1645) 4240,1645 4262.81,1667.81 4262.81,1692.81 R13.1 R12.1 ; 1525,1530 1525,1442.5 1637.5,1330 U3.2 U3.4 ; U3.4 2180,1330
  Bottom Layer w25: v2(2695,1380) 2110,1380 1890,1600 v2(1880,1600) v2(1880,1930) 1880,2174.5 ; v2(2930,2750) 2923.68,2750 2883.96,2789.72 2883.96,2871.04 2830,2925 1961.76,2925 1911.76,2875 v2(1905,2875) 1955,2825 1955,2679.35 1955.5,2678.85 1955.5,2641.15 1955,2640.65 1955,2505 v2(1875,2425) 1870.5,2425 1825.5,2380 1825.5,2229 1880,2174.5 ; v2(3340,1650) v2(3200,1650) 3200,2145 v2(3120,2225) v2(2700,2225) 2361.21,2225 2310.71,2174.5 1880,2174.5 ; Header1.1 Header1.1@3430,1550 ; v2(3680,1545) 3680.34,1544.66 3958.11,1544.66 3958.44,1545 4225,1545 ; v2(4025,2520) 4025,2135 3909.5,2019.5 3909.5,1745.5 4010.5,1644.5 4224.5,1644.5 v2(4225,1645) 4225,1545 ; v2(4190,1275) 4190,1281.76 4225,1316.76 4225,1545
VCC5: B1.2 C8.2 C10.2 C14.2 D1.2 H1.5 H2.1 H3.1 Header2.1 Header4.9 Header5.9 Header7.9 P3.1 U2.16 U3.3 | length 9379.9
  Top Layer w25: H1.5 1465,1780 1480,1765 v2(1480,1605) ; v2(1480,1405) 1480,1249.09 1475,1244.09 H3.1 1489.09,1230 1570,1230 ; v2(1565,1065) 1565,1225 1570,1230 ; C14.2 1661.26,1211.52 U3.3@1679.74,1230 ; U3.3 U3.3@1679.74,1230 ; P3.1@1690,2090 v2(1795,2090) ; v2(1795,2475) 2175,2475 2215,2515 2215,2605 Header4.9 ; D1.2 3960,1790 4005,1835 v2(4095,1835) ; v2(3955,1980.13) 3955,1985.26 4000.5,2030.76 C10.2 ; B1.2 4018.14,1430 4068.14,1480 4100,1480 ; Header7.9 4100,2900 v2(4325,2900) 4380,2845 H2.1 ; v2@4094.76,1690 4094.76,1485.24 4100,1480 ; C8.2 4100,1480 ; U2.16 4320,2346.57 v2(4320,2415) ; Header2.1 4516.17,2102.2 v2(4553.96,2140) ; 1570,1230 U3.3@1679.74,1230
  Bottom Layer w25: v2(1480,1405) v2(1480,1605) 1480,1611.76 1486.76,1605 1750,1605 1795,1650 v2(1795,2090) 1792.5,2092.5 1792.5,2472.5 v2(1795,2475) ; v2(1565,1065) 2038.68,1065 2062.65,1041.04 3275,1041.04 ; v2(3280,1190) 3280,1100 Header5.9 3275,1041.04 ; v2(3955,1980.13) 4100,1980.13 ; B1.2 4128.96,1316.04 4128.96,1053.04 4116.96,1041.04 3275,1041.04 ; v2(4095,1690) v2(4095,1835) 4095,1975.13 4100,1980.13 ; v2(4320,2415) 4380,2415 4385,2420 ; v2(4325,2900) 4385,2840 4385,2420 ; v2(4553.96,2140) 4390,2140 4385,2145 ; 4100,1980.13 4355.13,1980.13 4385,2010 4385,2145 ; 4385,2145 4385,2420
pads on no net: H1.1 H1.6 H2.3 Header1.6 Header2.6 Header2.7 Header2.8 Header2.9 Header2.MH1 Header2.MH2 U1.3 U1.4 U1.53 U2.9 U2.10 U2.11 U2.12 U2.13 U2.14 U2.15
copper on no net: | length 16612.3
  Top Layer w10: 850,1045 870,985 ; 850,2900 870,2960 ; 860,985 880,985 ; 860,2960 880,2960 ; 870,1696.58 870,985 ; 870,2248.42 870,2960 ; 890,1045 870,985 ; 890,2900 870,2960 ; 983.4,845 983.4,865 ; 1043.4,835 983.4,855 ; 1043.4,875 983.4,855 ; 2584.99,855 983.4,855 ; 3146.82,855 4748.4,855 ; 4688.4,835 4748.4,855 ; 4688.4,875 4748.4,855 ; 4748.4,845 4748.4,865 ; 1005,990 4740,990 4740,2955 1005,2955 1005,990

## Other copper
Top Layer:
  text "1975 (mil)" at 905.99,1706.58 h60 r90
  text "3765 (mil)" at 2594.99,819.01 h60

## Text inside footprints (layer, text, board x,y; h text height)
U3: Top Overlay "1" at 1853,1436 h50 r270